# Altium PCB AC-Power-Monitor.PcbDoc (part 1 of 3)
Units mm, origin at the board's own origin, x right, y up, seen from the top; angles counter-clockwise.
Board outline 94 x 57 mm, 4 copper layers (Top Layer, N / GND, L / VCC, Bottom Layer), stack 0.673 mm thick; 70 components, 59 nets, 252 pads, 596 vias.
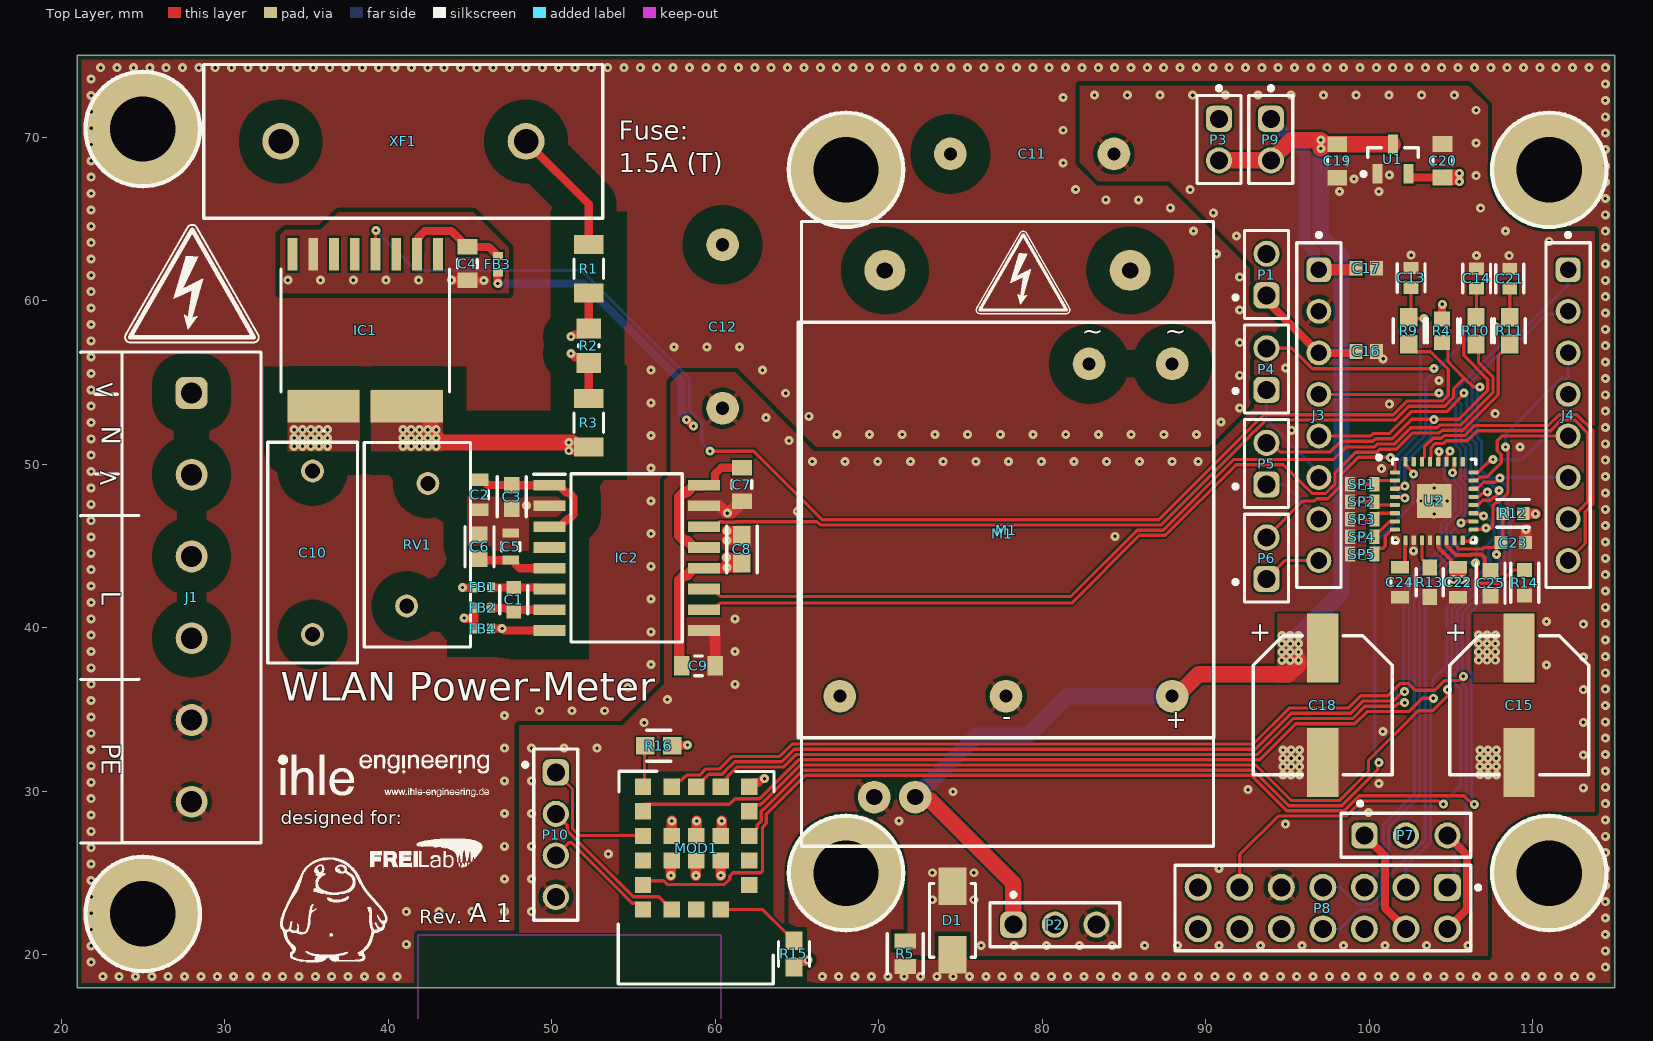
[diagram p0: Top Layer view]
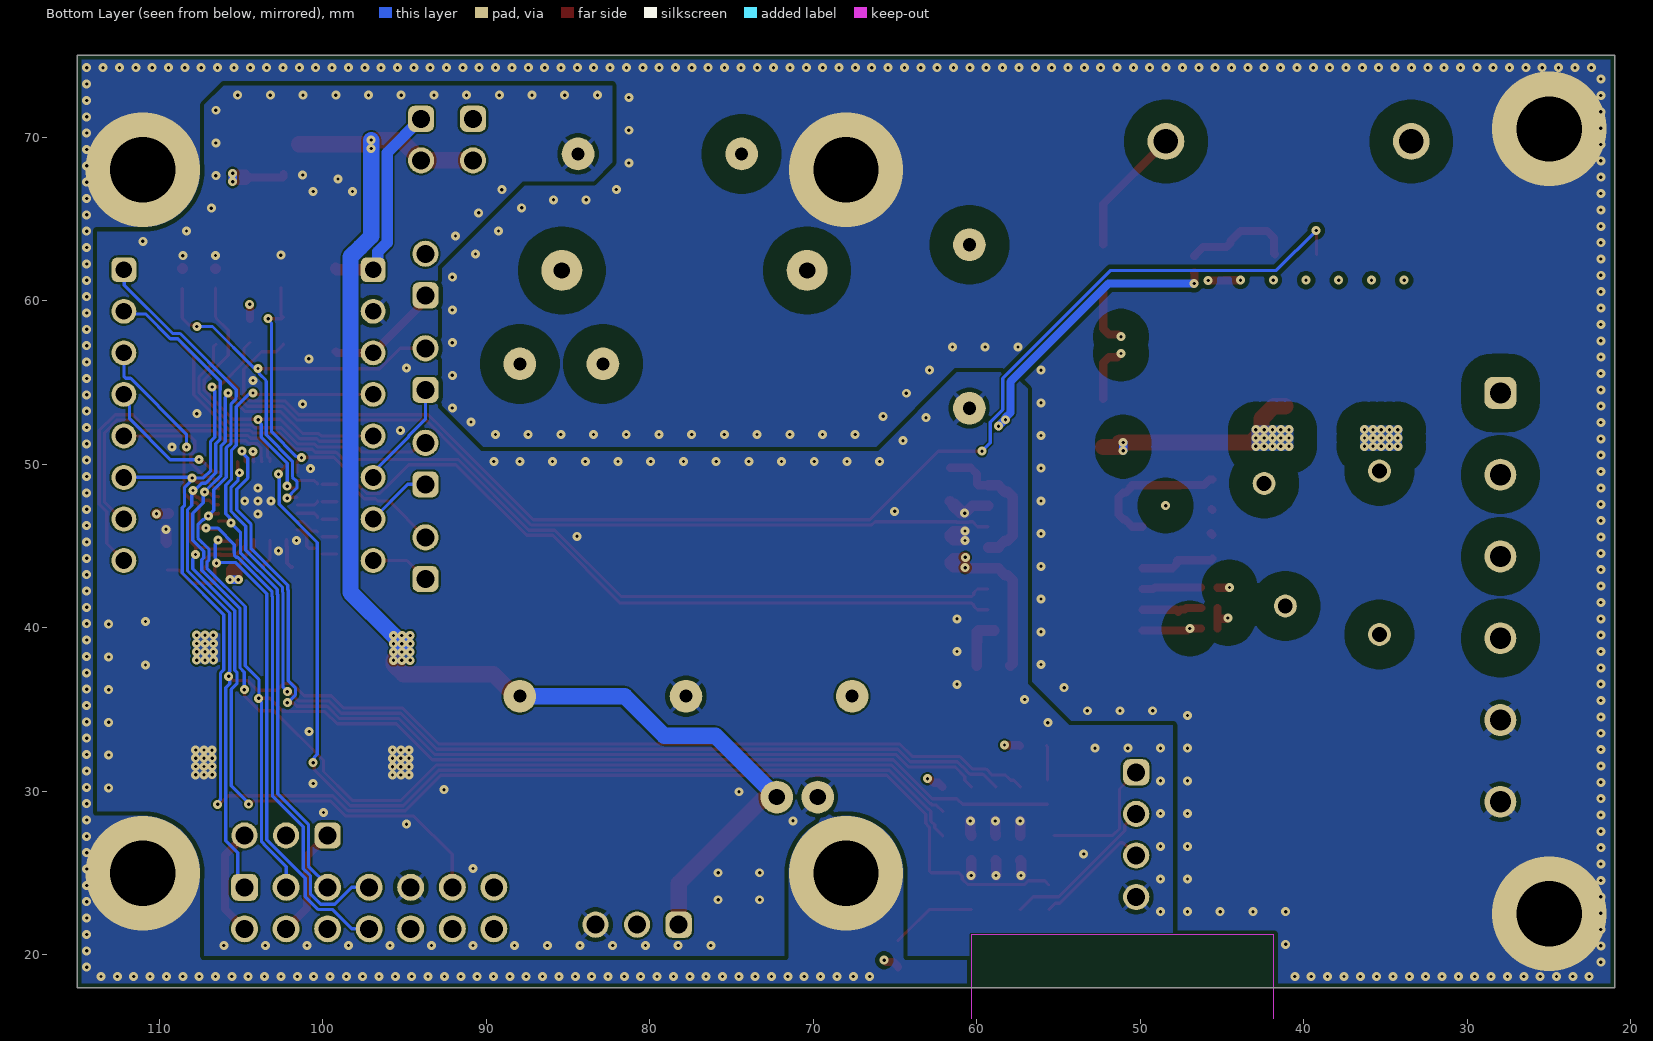
[diagram p1: Bottom Layer view, seen from below]
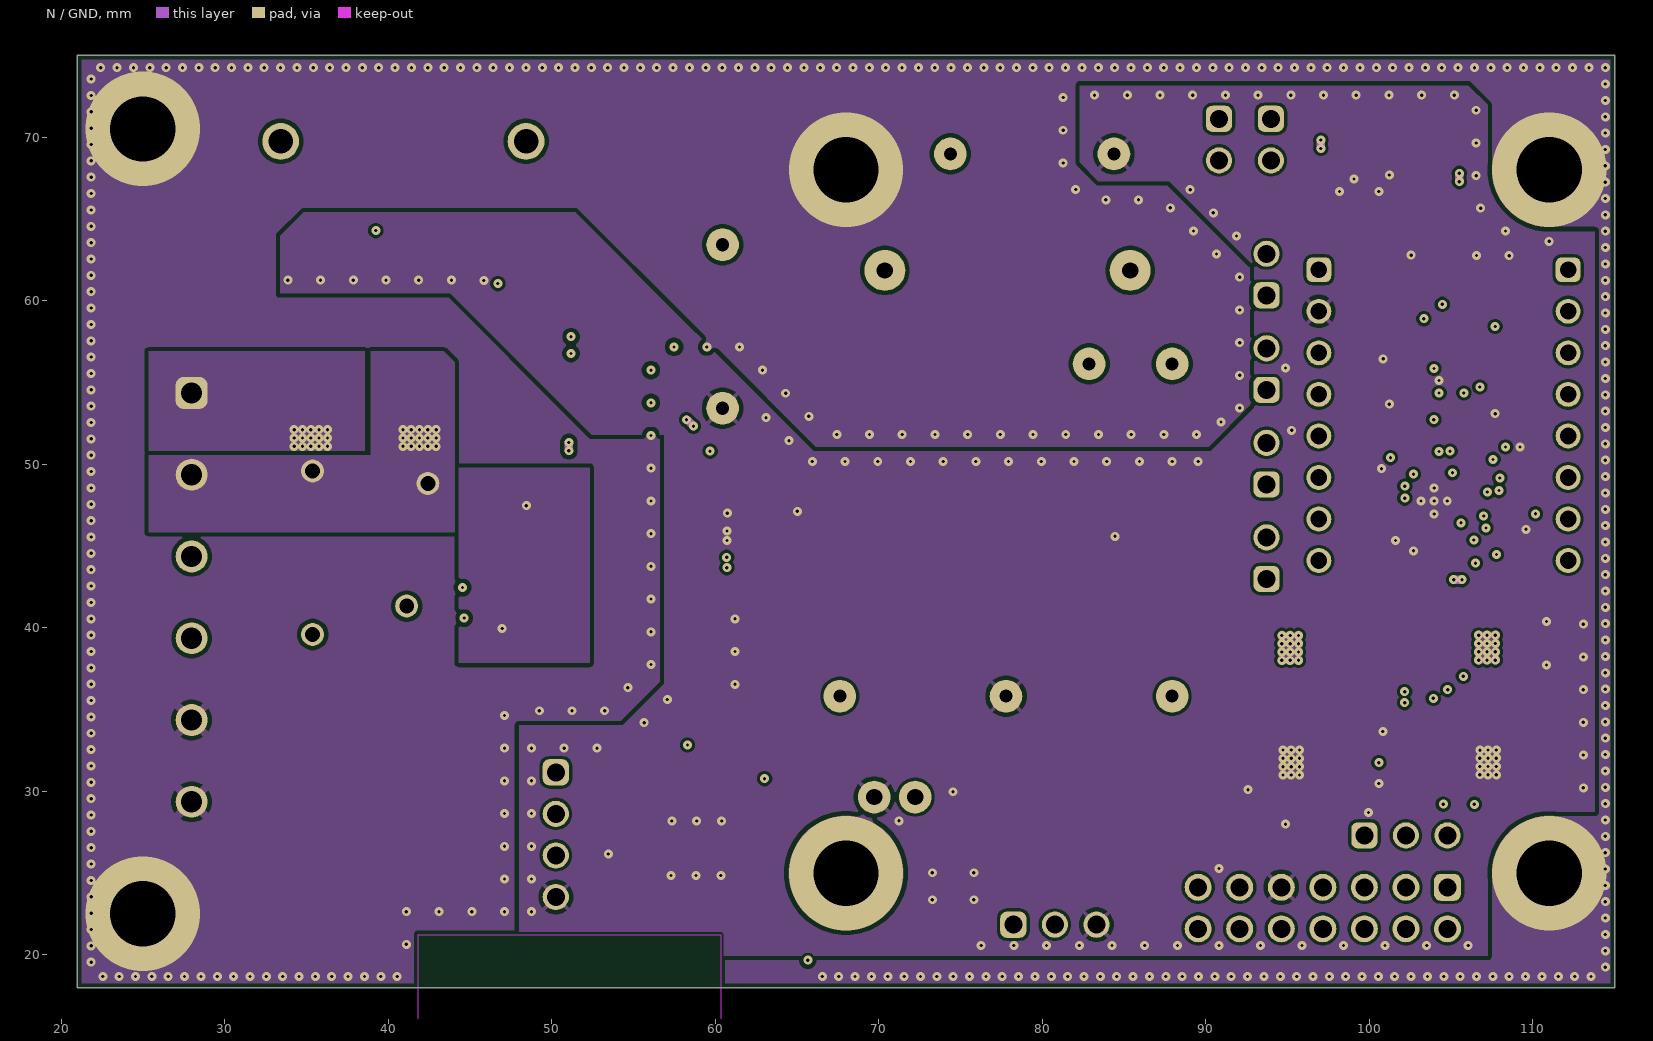
[diagram p2: N / GND]
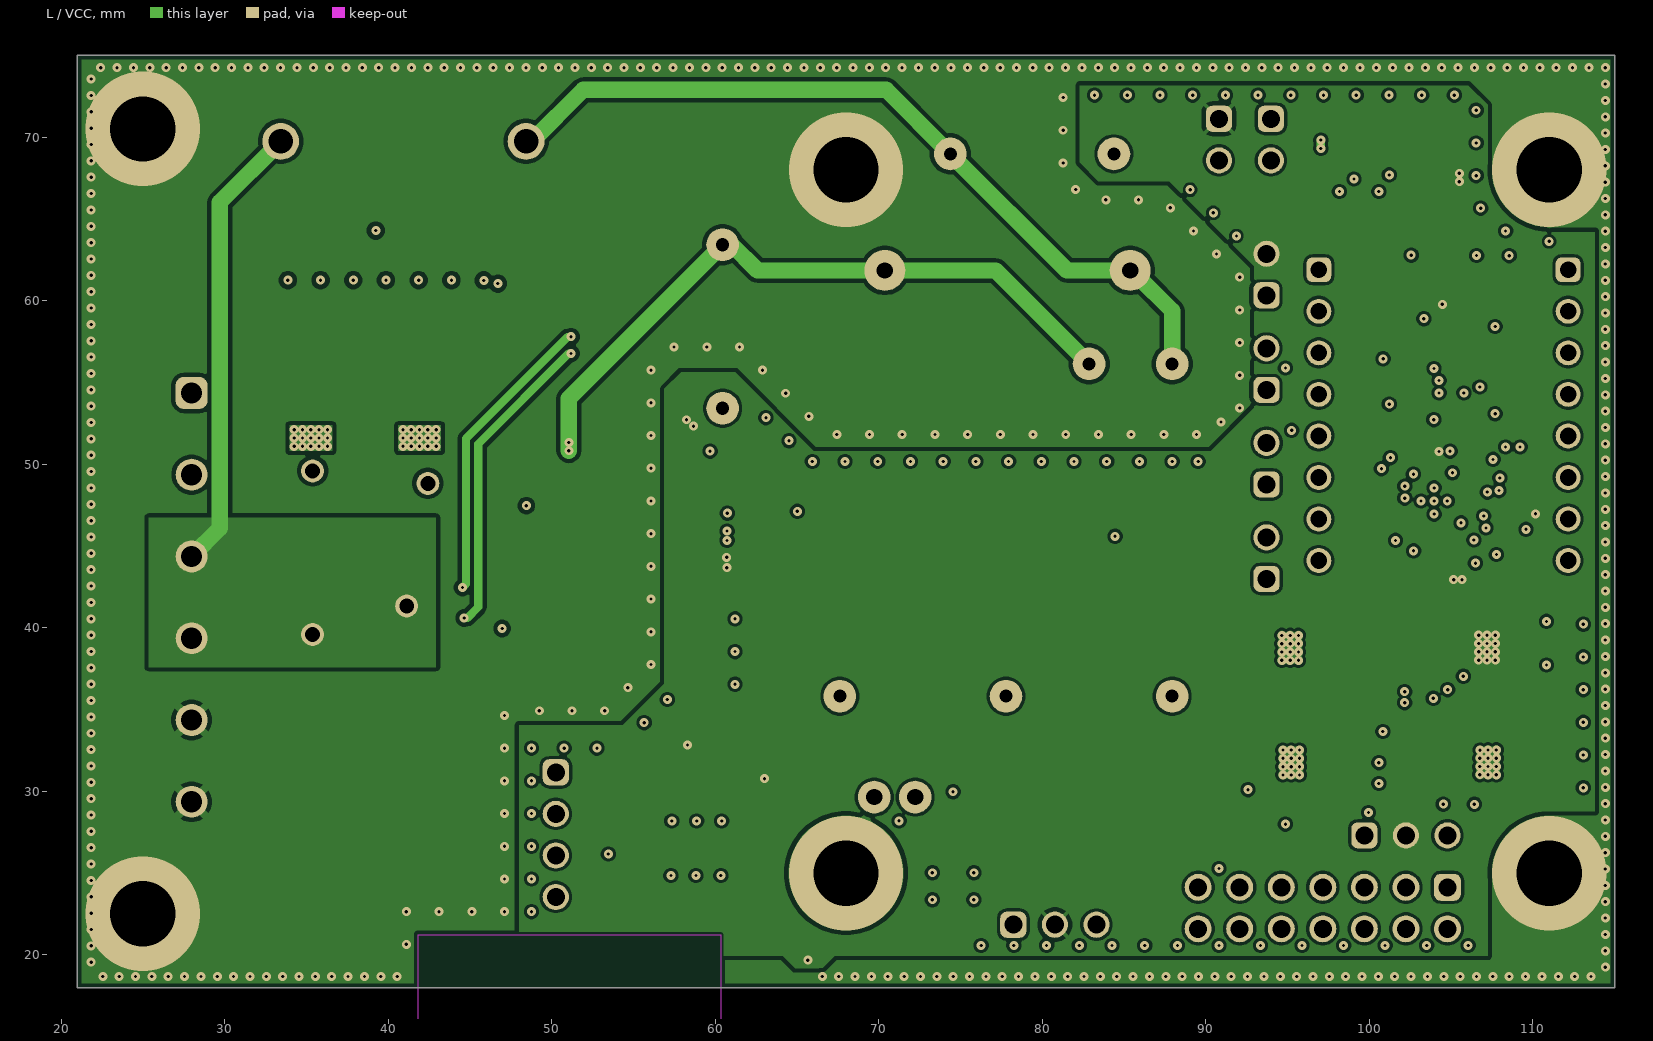
[diagram p3: L / VCC]
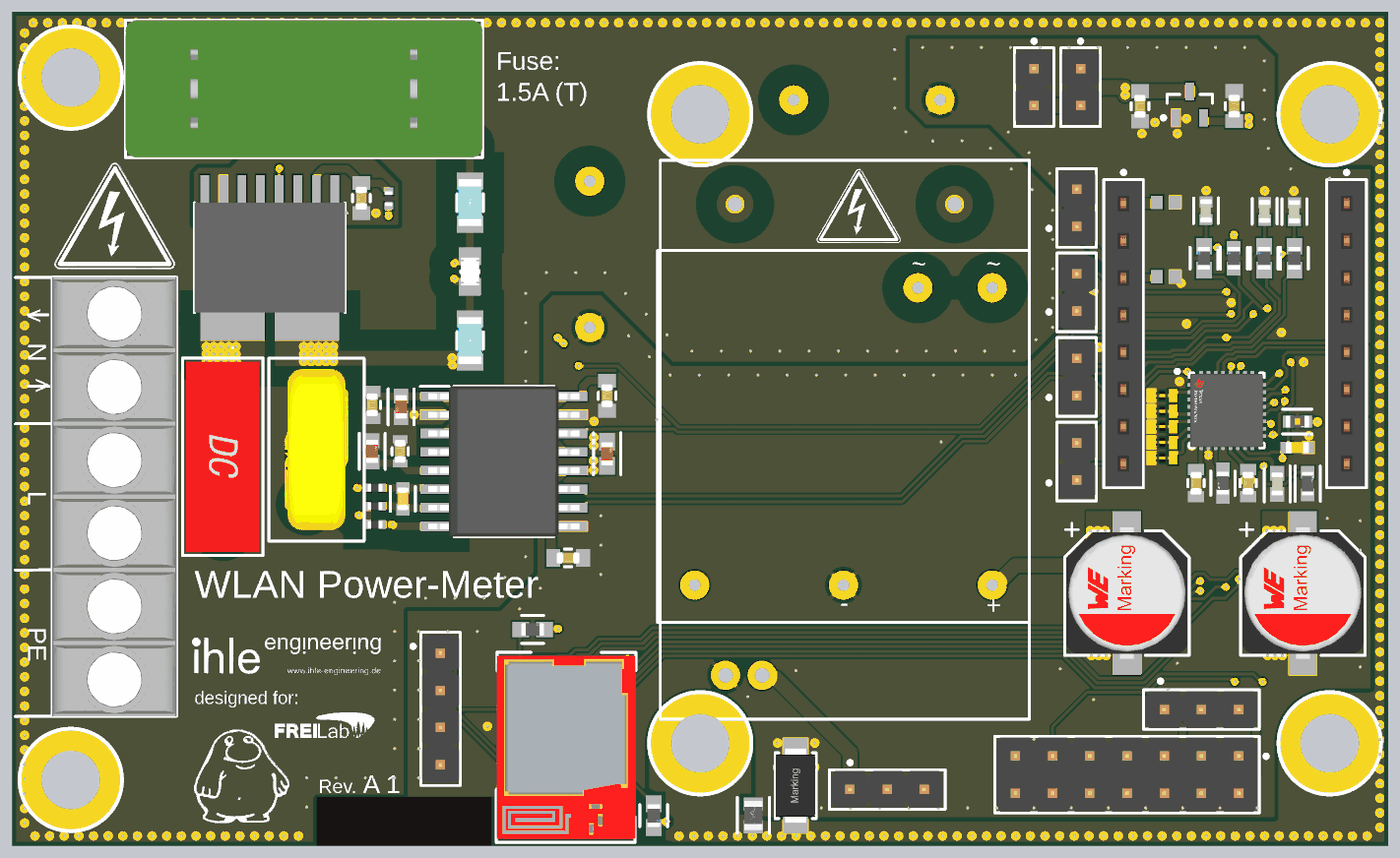
[diagram p5: 3D render of the assembled board from above, using the file's embedded part models]

## Layer stack, top to bottom
Top Solder: solder mask 0.0102, Solder Resist, Dk 3.5
Top Layer: signal copper 0.0356
Dielectric 2: prepreg 0.0711, PP-006, Dk 4.1
N / GND: signal copper 0.07
Dielectric 1: dielectric 0.32, FR-4, Dk 4.8
L / VCC: signal copper 0.07
Dielectric 3: prepreg 0.0711, PP-006, Dk 4.1
Bottom Layer: signal copper 0.0356
Bottom Solder: solder mask 0.0102, Solder Resist, Dk 3.5

## Board outline
21,18 115,18 115,75 21,75

## Design rules (kind name [scope] priority, off if disabled: settings)
AcuteAngle [All] p1: minimum=6.00000000000000E+0001 checktracksonly=FALSE
BoardOutlineClearance [All] p1: gap=0.254 ignorepadtopadclearanceinfootprint=FALSE except(0: Arc-SplitContinuation Track-SplitContinuation SMDPad-SplitContinuation THPad-SplitContinuation Via-SplitContinuation Fill-SplitContinuation Poly-SplitContinuation Region-SplitContinuation Text-SplitContinuation; 0.1: Track-OutlineEdge Text-OutlineEdge; 0.5: SMDPad-OutlineEdge THPad-OutlineEdge)
Clearance Clearance_230V_PE_others [InNet('PE') vs NOT InNetClass('230V AC Net')] p1: gap=0.2 ignorepadtopadclearanceinfootprint=FALSE
Clearance Clearance_230V_others [InNetClass('230V AC Net') vs NOT InNetClass('230V AC Net') AND OnOutside] p2: gap=1 ignorepadtopadclearanceinfootprint=FALSE
Clearance Clearance_half_230V_others [InNetClass('half 230V AC') vs NOT InNetClass('230V AC Net') AND OnOutside] p3: gap=1 ignorepadtopadclearanceinfootprint=FALSE
Clearance Clearance_230V_HighSide [InNetClass('HighSide') vs InNetClass('HighSide')] p4: gap=0.25 ignorepadtopadclearanceinfootprint=FALSE
Clearance Clearance_230V_N_Nout [InNet('N') vs InNet('Nout')] p5: gap=0.25 ignorepadtopadclearanceinfootprint=FALSE
Clearance Clearance_230V [InNetClass('230V AC Net')] p6: gap=0.25 ignorepadtopadclearanceinfootprint=FALSE
Clearance Clearance_half_230V [InNetClass('half 230V AC')] p7: gap=0.25 ignorepadtopadclearanceinfootprint=FALSE
Clearance Clearance_inner [OnMid] p8: gap=0.18 ignorepadtopadclearanceinfootprint=FALSE
Clearance [All] p9: gap=0.12 ignorepadtopadclearanceinfootprint=FALSE
ComponentClearance [All] p1: gap=0 collisioncheckmode=3 verticalgap=0.254 showdistances=FALSE
Creepage Creepage_Current_Sense [InNetClass('Current_Sense') vs InNetClass('Current_Sense')] p1: checkdistance=0.25 applytopolygonpour=TRUE
Creepage Creepage_230V_HighSide [InNetClass('HighSide') vs InNetClass('HighSide')] p2: checkdistance=0.25 applytopolygonpour=TRUE
Creepage Creepage_230V_PE_others [InNet('PE') vs NOT InNetClass('230V AC Net')] p3: checkdistance=0.25 applytopolygonpour=TRUE
Creepage Creepage_half_230V [InNetClass('half 230V AC') vs NOT InNetClass('HighSide')] p4: checkdistance=1.25
Creepage Creepage_230V_others [NOT InNetClass('230V AC Net') vs InNetClass('230V AC Net')] p5: checkdistance=4
Creepage Creepage_230V [InNetClass('230V AC Net') vs OnOutside] p6: checkdistance=1.4 applytopolygonpour=TRUE
Height [All] p1: minheight=0 maxheight=100 prefheight=12.7
HoleSize [All] p1: absolutevalues=TRUE maxlimit=4 minlimit=0.2 maxpercent=80.000 minpercent=20.000
PlaneConnect [All] p1: planeconnectstyle=Direct reliefexpansion=0.508 reliefentries=4 reliefconductorwidth=0.254 reliefairgap=0.254
PolygonConnect [All] p1: connectstyle=Direct reliefconductorwidth=0.254 reliefentries=4 polygonreliefangle="45 Angle" airgapwidth=0.254
RoutingVias [All] p1: holewidth=0.2 width=0.55 viastyle="Through Hole" minholewidth=0.2 minwidth=0.55 maxholewidth=4 maxwidth=7.1
SMDEntry [All] p1: side=TRUE corner=TRUE anyangle=TRUE
SilkToSilkClearance [All] p1 off: silktosilkclearance=0.254
SilkToSolderMaskClearance [IsPad] p1 off: minsilkscreentomaskgap=0.254 clearancetoexposedcopper=TRUE
SolderMaskExpansion [All] p1: expansion=0.05 istentingtop=FALSE
SupplyNets "Schematic Supply Nets_7" [InNet('Nout')] p1: voltage=0.000
SupplyNets "Schematic Supply Nets_6" [InNet('L')] p2: voltage=0.000
SupplyNets "Schematic Supply Nets_5" [InNet('GND')] p3: voltage=0.000
SupplyNets "Schematic Supply Nets_4" [InNet('N')] p4: voltage=0.000
SupplyNets "Schematic Supply Nets_3" [InNet('+5.0V')] p5: voltage=0.000
SupplyNets "Schematic Supply Nets_2" [InNet('Lfused')] p6: voltage=0.000
SupplyNets "Schematic Supply Nets_1" [InNet('PE')] p7: voltage=0.000
SupplyNets "Schematic Supply Nets" [InNet('+3.3V')] p8: voltage=0.000
Width [All] p1: maxlimit=1 minlimit=0.12 preferedwidth=0.4 midlayer1_minwidth=0.275 midlayer2_minwidth=0.275 minimp=50.000000 maximp=50.000000 favimp=50.000000
24 further rules are at their usual default settings.

## Classes and differential pairs
net class Current_Sense: N Nout
net class "half 230V AC": VN VP
net class HighSide: HGND NC1 NetC1_1 NetC1_2 NetC2_2 NetC5_2 NetIC2_4 VN VP
net class "230V AC Net": HGND L Lfused N NC1 NetC1_1 NetC1_2 NetC2_2 NetC5_2 NetIC2_4 Nout PE VN VP

## Components (designator, comment, footprint, x,y, rotation, side; value= is the part's Value field where it differs from the comment)
C1 "CC0603KRX7R9BB103" FP-CC0603-DA-MFG 47.685,41.71 r270 top value="10 nF"
C2 "CGA3E1X7R1E105K080AC" FP-CGA3E-0_3-0_1-IPC_B 45.593,48.133 r90 top
C3 "06035C102KAT2A" FP-0603-L_1_6_0_15-W_0_81-IPC_B 47.561,47.997 r270 top
C4 "CGA3E2X7R1H104K080AA" FP-CGA3E-0_3-0_1-IPC_A 44.851,62.263 r90 top
C5 "CGA3E2X7R1H104K080AA" FP-CGA3E-0_3-0_1-IPC_C 47.498,44.958 r270 top
C6 "06035C102KAT2A" FP-0603-L_1_6_0_15-W_0_81-IPC_B 45.593,44.958 r90 top
C7 "CGA3E2X7R1H104K080AA" FP-CGA3E-0_3-0_1-IPC_A 61.638,48.757 r90 top
C8 "06035C102KAT2A" FP-0603-L_1_6_0_15-W_0_81-IPC_A 61.638,44.794 r90 top
C9 "CGA3E1X7R1E105K080AC" FP-CGA3E-0_3-0_1-IPC_A 58.978,37.671 r180 top
C10 "10nF" WCAP-FTX2_L13W5H11_CS 35.384,44.588 r270 top
C11 "MKY22W21003I00" MKY22W2 79.383,68.973 r90 top
C12 "MKY22W21003I00" MKY22W2 60.452,58.42 r0 top
C13 "C0603C332J5GACTU" FP-C0603C-CF-MFG 102.552,61.397 r90 top value="3,300 pF"
C14 "C0603C332J5GACTU" FP-C0603C-CF-MFG 106.555,61.359 r90 top value="3,300 pF"
C15 "180µF" WCAP-PSLC_D8H11.7 109.165,35.264 r90 top
C16 "C0603C105K3RACTU" CAPC1608X87X35LL15T15 99.822,56.896 r180 top
C17 "C0603C105K3RACTU" CAPC1608X87X35LL15T15 99.822,61.976 r180 top
C18 "180µF" WCAP-PSLC_D8H11.7 97.15,35.264 r90 top
C19 "CGA3E1X7R1E105K080AC" FP-CGA3E-0_3-0_1-IPC_A 98.041,68.545 r90 top
C20 "CGA3E1X7R1E105K080AC" FP-CGA3E-0_3-0_1-IPC_A 104.48,68.553 r270 top
C21 "C0603C332J5GACTU" FP-C0603C-CF-MFG 108.585,61.341 r90 top value="3,300 pF"
C22 "CGA3E1X7R1E105K080AC" FP-CGA3E-0_3-0_1-IPC_B 105.429,42.782 r90 top
C23 "885012206085" WCAP-CSGP_0603_L1.6W0.8H0.8_Reflow 108.791,45.212 r180 top
C24 "CGA3E2X7R1H104K080AA" FP-CGA3E-0_3-0_1-IPC_B 101.873,42.782 r90 top
C25 "C0603C474K4RACTU" FP-C0603C-CF-IPC_B 107.414,42.727 r270 top value="0.47 μF"
D1 "400W, 54VDC" WE-TVSP_DO-214AC_Bidirectional 74.512,22.105 r90 top
FB1 "1800Ohm" WE-TMSB_0402_HF/HS/WB 45.785,42.462 r0 top
FB2 "1800Ohm" WE-TMSB_0402_HF/HS/WB 45.78,41.208 r0 top
FB3 "1800Ohm" WE-TMSB_0402_HF/HS/WB 46.72,62.23 r270 top
FB4 "1800Ohm" WE-TMSB_0402_HF/HS/WB 45.783,39.954 r0 top
IC1 "TMCS1127C1AQDVGR" TMCS1127C1AQDVGR 38.598,58.188 r90 top
IC2 "AMC3330DWER" SOIC127P1030X265-16N 54.585,44.274 r0 top
J1 "691131710006" 691131710006 27.984,41.859 r270 top
J3 "61300811821" 61300811821 96.915,52.999 r270 top
J4 "61300811821" 61300811821 112.155,52.999 r270 top
M1 "AC/DC-Buck-Module" AM11-12W05V 77.877,45.747 r270 top
M1 "AC/DC-Buck-Module" "TMPS 03" 77.784,45.974 r0 top
MOD1 "WIRL-COMB_2617011025000_1" WE-FP-7 58.84,24.97 r90 top
P1 "61300211121" 61300211121 93.718,61.598 r90 top
P2 "61300311121" 61300311121 80.772,21.844 r0 top
P3 "61300211121" 61300211121 90.805,69.85 r270 top
P4 "61300211121" 61300211121 93.718,55.818 r90 top
P5 "61300211121" 61300211121 93.718,50.038 r90 top
P6 "61300211121" 61300211121 93.718,44.258 r90 top
P7 "61300311121" 61300311121 102.235,27.305 r0 top
P8 "61301421121" 61301421121 97.155,22.86 r180 top
P9 "61300211121" 61300211121 93.98,69.85 r270 top
P10 "61300411121" 61300411121 50.256,27.35 r270 top
R1 "RK73H2BTTD1804F" FP-RK73H2B-IPC_B 52.274,61.954 r90 top
R2 "CRCW080510K0FKEA" FP-CRCW0805-e3-IPC_A 52.274,57.242 r90 top
R3 "RK73H2BTTD1804F" FP-RK73H2B-IPC_B 52.274,52.531 r90 top
R4 "CRCW060347K0FKEA" FP-CRCW0603-e3-IPC_B 104.442,58.158 r90 top
R5 "CRGCQ0805F1M0" FP-CRGCQ0805-IPC_C 71.628,20.066 r90 top value=1MΩ
R9 "CRCW0603470KFKEA" FP-CRCW0603-e3-IPC_A 102.411,58.158 r90 top
R10 "CRCW0603470KFKEA" FP-CRCW0603-e3-IPC_A 106.523,58.158 r90 top
R11 "CRCW0603470KFKEA" FP-CRCW0603-e3-IPC_A 108.585,58.158 r90 top
R12 "KTR03EZPF4702" FP-KTR03-IPC_C 108.791,46.99 r0 top
R13 "CPF0603B20KE1" FP-CPF0603-MFG 103.701,42.782 r90 top value=20KΩ
R14 "AC0603FR-071KL" FP-AC0603-IPC_B 109.498,42.75 r90 top
R15 "CRCW06031K50FKEA" FP-CRCW0603-e3-IPC_A 64.819,20.053 r270 top
R16 "CRCW06031K50FKEA" FP-CRCW0603-e3-IPC_A 56.553,32.781 r0 top
RV1 "275VAC, 350VDC" D12.5W6.5H16P1.3 41.784,45.076 r270 top
SP1 "Scratch_NetTie" Scratch_NetTie_0603 99.568,48.768 r0 top net-tie
SP2 "Scratch_NetTie" Scratch_NetTie_0603 99.568,47.702 r0 top net-tie
SP3 "Scratch_NetTie" Scratch_NetTie_0603 99.568,46.636 r0 top net-tie
SP4 "Scratch_NetTie" Scratch_NetTie_0603 99.568,45.57 r0 top net-tie
SP5 "Scratch_NetTie" Scratch_NetTie_0603 99.568,44.504 r0 top net-tie
U1 "MCP1700T-3302E/TT" SOT-23-TT3_L 101.448,68.655 r90 top
U2 "MSP430I2041TRHBR" FP-RHB0032M-MFG 103.965,47.752 r0 top
XF1 "696106003002" 696106003002 40.934,69.738 r0 top

## Footprints (in the part's own frame and the unit in brackets; to place one, negate y for a bottom-side part, rotate by r counter-clockwise, add the part's x,y. Pads: shape width x height; smd on the part's side, far side on the other; paste and mask are expansions set on the pad)
61300211121 [mm] "Pin Header, pitch 2.54 mm, THT, Vertical, single row, 2p"
  rrect50% 1.6x1.6 hole 1.1: 1(-1.27,0)
  round 1.6 hole 1.1: 2(1.27,0)
  silkscreen extent -2.69,-1.35 2.69,2.02, body extent -2.54,-1.27 2.54,1.27, height 8.57
61300311121 [mm] "Pin Header, pitch 2.54 mm, THT, Vertical, single row, 3p"
  rrect50% 1.6x1.6 hole 1.1: 1(-2.54,0)
  round 1.6 hole 1.1: 2(0,0) 3(2.54,0)
  silkscreen extent -3.96,-1.35 3.96,1.96, body extent -3.81,-1.27 3.81,1.27, height 8.57
61300411121 [mm] "Pin Header, pitch 2.54 mm, THT, Vertical, single row, 4p"
  rrect50% 1.6x1.6 hole 1.1: 1(-3.81,0)
  round 1.6 hole 1.1: 2(-1.27,0) 3(1.27,0) 4(3.81,0)
  silkscreen extent -5.23,-1.99 5.23,1.35, body extent -5.08,-1.27 5.08,1.27, height 8.57
61300811821 [mm] "Socket Header, Pitch 2.54 mm, THT, Vertical, single row, 8p"
  rrect50% 1.52x1.52 hole 1.02: 1(-8.89,0)
  round 1.52 hole 1.02: 2(-6.35,0) 3(-3.81,0) 4(-1.27,0) 5(1.27,0) 6(3.81,0) 7(6.35,0) 8(8.89,0)
  silkscreen extent -11.14,-1.35 10.54,1.35, body extent -10.41,-1.25 10.41,1.25, height 8.55
61301421121 [mm] "Pin Header, pitch 2.54 mm, THT, Vertical, dual row, 14p"
  rrect50% 1.65x1.65 hole 1.1: 1(-7.62,-1.27)
  round 1.65 hole 1.1: 2(-7.62,1.27) 3(-5.08,-1.27) 4(-5.08,1.27) 5(-2.54,-1.27) 6(-2.54,1.27) 7(0,-1.27) 8(0,1.27) 9(2.54,-1.27) 10(2.54,1.27) 11(5.08,-1.27) 12(5.08,1.27) 13(7.62,-1.27) 14(7.62,1.27)
  silkscreen extent -9.62,-2.62 9.04,2.62, body extent -8.89,-2.54 8.89,2.54, height 8.59
691131710006 [mm] "SERIE 1317 - 5.00 MM - HORIZONTAL CABLE ENTRY WITH PRESSURE CLAMP - WR-TBL"
  rrect50% 1.95x1.95 hole 1.3: 1(-12.5,0)
  round 1.95 hole 1.3: 2(-7.5,0) 3(-2.5,0) 4(2.5,0) 5(7.5,0) 6(12.5,0)
  silkscreen extent -15,-4.25 15,4.25, body extent -15,-4.25 15,4.25, height 15.5
696106003002 [mm] "FUSEHOLDER BLOCKS - PCB - CLIP COVER - THT"
  round 2.25 hole 1.5: 1(-7.5,0) 2(7.5,0)
  silkscreen extent -12.2,-4.7 12.2,4.7, body extent -12.2,-4.7 12.2,4.7, height 11.55
AM11-12W05V [mm]
  round 2.5 hole 1 mask-0.6: 1(-16.1,7.5) 2(-16.1,-7.5)
  round 2 hole 1: 3(16.1,-5.65) 4(16.1,-8.15)
  silkscreen extent -19.1,-12.6 19.1,12.6, body extent -19.1,-12.6 19.1,12.6, height 23
CAPC1608X87X35LL15T15 [mm] "Chip Capacitor, 2-Leads, Body 1.60x0.80mm, IPC High Density"
  rect 0.8x0.9 smd: 1(-0.625,0) 2(0.625,0)
  body extent -0.87,-0.48 0.87,0.48, height 0.87
D12.5W6.5H16P1.3 [mm] "Disk Varistor, Diameter 12.5mm, Width 6.5mm"
  round 1.4 hole 0.9: 1(-3.75,0.65) 2(3.75,-0.65)
  silkscreen extent -6.25,-3.25 6.25,3.25, body extent -5.5,-2.2 5.5,2.2, height 13.4
FP-0603-L_1_6_0_15-W_0_81-IPC_A [mil]
  rect 47.5x42.06 smd paste+0 mask+0: 1(-32.51,0) 2(32.51,0)
  silkscreen extent -56,-37 56,37, body extent -76,-41 76,41, height 10
FP-0603-L_1_6_0_15-W_0_81-IPC_B [mm]
  rect 1.007x0.968 smd paste+0 mask+0: 1(-0.726,0) 2(0.726,0)
  silkscreen extent -1.23,-0.88 1.23,0.88, body extent -1.48,-0.73 1.48,0.73, height 0.25
FP-AC0603-IPC_B [mm]
  rect 0.859x0.912 smd paste+0 mask+0: 1(-0.777,0) 2(0.777,0)
  silkscreen extent -1.21,-0.86 1.21,0.86, body extent -1.46,-0.71 1.46,0.71, height 0.25
FP-C0603C-CF-IPC_B [mm]
  rect 1.007x0.958 smd paste+0 mask+0: 1(-0.726,0) 2(0.726,0)
  silkscreen extent -1.23,-0.88 1.23,0.88, body extent -1.48,-0.73 1.48,0.73, height 0.25
FP-C0603C-CF-MFG [mm]
  rect 0.75x0.9 smd paste+0 mask+0: 1(-0.6,0) 2(0.6,0)
  silkscreen extent -0.87,-0.85 0.88,0.85, body extent -1.2,-0.6 1.2,0.6, height 0.25
FP-CC0603-DA-MFG [mm]
  rect 0.8x0.9 smd paste+0 mask+0: 1(-0.75,0) 2(0.75,0)
  silkscreen extent -0.85,-0.85 0.85,0.85, body extent -1.35,-0.75 1.35,0.75, height 0.25
FP-CGA3E-0_3-0_1-IPC_A [mm]
  rect 0.956x1.206 smd paste+0 mask+0: 1(-1.025,0) 2(1.025,0)
  silkscreen extent -0.25,-0.6 0.25,0.6, body extent -2,-1.1 2,1.1, height 0.25
FP-CGA3E-0_3-0_1-IPC_B [mm]
  rect 0.756x1.106 smd paste+0 mask+0: 1(-0.925,0) 2(0.925,0)
  silkscreen extent -0.25,-0.55 0.25,0.55, body extent -1.55,-0.8 1.55,0.8, height 0.25
FP-CGA3E-0_3-0_1-IPC_C [mm]
  rect 0.556x1.006 smd paste+0 mask+0: 1(-0.825,0) 2(0.825,0)
  silkscreen extent -0.25,-0.55 0.25,0.55, body extent -1.2,-0.65 1.2,0.65, height 0.25
FP-CPF0603-MFG [mm]
  rect 1x0.9 smd paste+0 mask+0: 1(-0.9,0) 2(0.9,0)
  silkscreen extent -0.82,-0.82 0.82,0.82, body extent -1.5,-0.55 1.5,0.55, height 0.25
FP-CRCW0603-e3-IPC_A [mm]
  rect 1.135x1.062 smd paste+0 mask+0: 1(-0.815,0) 2(0.815,0)
  silkscreen extent -0.75,-0.95 0.75,0.95, body extent -1.88,-1.03 1.88,1.03, height 0.25
FP-CRCW0603-e3-IPC_B [mm]
  rect 0.935x0.962 smd paste+0 mask+0: 1(-0.715,0) 2(0.715,0)
  silkscreen extent -0.75,-0.95 0.75,0.9, body extent -1.43,-0.73 1.43,0.73, height 0.25
FP-CRCW0805-e3-IPC_A [mil]
  rect 47.5x59.38 smd paste+0 mask+0: 1(-41.37,0) 2(41.37,0)
  silkscreen extent -3,-25 3,25, body extent -85,-49 85,49, height 10
FP-CRGCQ0805-IPC_C [mm]
  rect 0.906x1.31 smd paste+0 mask+0: 1(-0.776,0) 2(0.776,0)
  silkscreen extent -1.23,-1.1 1.23,1.1, body extent -1.33,-0.8 1.33,0.8, height 0.25
FP-KTR03-IPC_C [mm]
  rect 0.758x0.812 smd paste+0 mask+0: 1(-0.627,0) 2(0.627,0)
  silkscreen extent -1.01,-0.85 1.01,0.85, body extent -1.11,-0.55 1.11,0.55, height 0.25
FP-RHB0032M-MFG [mm]
  rrect40% 0.6x0.25 smd paste+0 mask+0: 1(-2.4,1.75) 2(-2.4,1.25) 3(-2.4,0.75) 4(-2.4,0.25) 5(-2.4,-0.25) 6(-2.4,-0.75) 7(-2.4,-1.25) 8(-2.4,-1.75) 17(2.4,-1.75) 18(2.4,-1.25) 19(2.4,-0.75) 20(2.4,-0.25) 21(2.4,0.25) 22(2.4,0.75) 23(2.4,1.25) 24(2.4,1.75)
  rrect40% 0.25x0.6 smd paste+0 mask+0: 9(-1.75,-2.4) 10(-1.25,-2.4) 11(-0.75,-2.4) 12(-0.25,-2.4) 13(0.25,-2.4) 14(0.75,-2.4) 15(1.25,-2.4) 16(1.75,-2.4) 25(1.75,2.4) 26(1.25,2.4) 27(0.75,2.4) 28(0.25,2.4) 29(-0.25,2.4) 30(-0.75,2.4) 31(-1.25,2.4) 32(-1.75,2.4)
  rrect5% 2.1x2.1 smd paste-1000 mask+0: 33(0,0)
  silkscreen extent -3.51,-2.55 2.55,2.79, body extent -2.8,-2.8 2.8,2.8, height 0.25
FP-RK73H2B-IPC_B [mm]
  rect 1.155x1.806 smd paste+0 mask+0: 1(-1.475,0) 2(1.475,0)
  silkscreen extent -0.6,-0.9 0.6,0.9, body extent -2.3,-1.15 2.3,1.15, height 0.25
MKY22W2 [mm] "10nF Y2 Capacitor"
  round 2 hole 0.8: 1(0,5) 2(0,-5)
  body extent -4,-6.5 4,6.5, height 11
Scratch_NetTie_0603 [mm] "NetTie / 0R-Bridge / scratch wire to open; add 0R 0603 to re-close"
  rect 0.6x0.9 smd paste-2539.97: 1(-0.75,0) 2(0.75,0)
  Top Layer lines w0.2: -0.45,0 0.45,0
  Top Layer keep-out region: -0.2,0.1 0.2,0.1 0.2,0.3 -0.2,0.3
  Top Layer keep-out region: 0.2,-0.1 -0.2,-0.1 -0.2,-0.3 0.2,-0.3
SOIC127P1030X265-16N [mm]
  rect 1.95x0.65 smd: 1(-4.725,4.445) 2(-4.725,3.175) 3(-4.725,1.905) 4(-4.725,0.635) 5(-4.725,-0.635) 6(-4.725,-1.905) 7(-4.725,-3.175) 8(-4.725,-4.445) 9(4.725,-4.445) 10(4.725,-3.175) 11(4.725,-1.905) 12(4.725,-0.635) 13(4.725,0.635) 14(4.725,1.905) 15(4.725,3.175) 16(4.725,4.445)
  silkscreen extent -5.7,-5.15 3.4,5.15, body extent -5.17,-5.15 5.17,5.15, height 2.59
SOT-23-TT3_L [mm] "SOT23, 3-Leads, Body 2.9x1.3mm, Pitch 0.95mm, Lead Span 2.4mm, IPC High Density"
  rect 1.2x0.6 smd: 1(-0.9,0.95) 2(-0.9,-0.95) 3(0.9,0)
  silkscreen extent -1.02,-1.55 0.7,1.92, body extent -0.7,-1.52 0.7,1.53, height 1.12
TMCS1127C1AQDVGR [mm]
  rect 2x4.41 smd: 1(-4.65,2.54) 2(-4.65,-2.54)
  rect 2x0.6 smd: 3(4.65,-4.445) 4(4.65,-3.175) 5(4.65,-1.905) 6(4.65,-0.635) 7(4.65,0.635) 8(4.65,1.905) 9(4.65,3.175) 10(4.65,4.445)
  silkscreen extent -6.2,-5.15 3.75,5.15, body extent -3.75,-5.15 3.75,5.15, height 2.75
"TMPS 03" [mm] "TRACO POWER AC/DC Power Supply TMPS 03 Series, 3 Watt"
  round 2 hole 0.8: 1(10.16,10.16) 2(5.08,10.16) 3(10.16,-10.16) 4(0,-10.16) NC(-10.16,-10.16)
  silkscreen extent -12.7,-12.7 12.7,12.7, body extent -12.7,-12.7 12.7,12.7, height 16.3
WCAP-CSGP_0603_L1.6W0.8H0.8_Reflow [mm] "Ceramic Capacitors, body 1.6x0.8mm"
  rect 0.8x0.8 smd: 1(-0.75,0) 2(0.75,0)
  body extent -0.8,-0.4 0.8,0.4, height 0.8
WCAP-FTX2_L13W5H11_CS [mm] "Film Capacitors, 13x5x11mm"
  round 1.4 hole 0.9: 1(-5,0) 2(5,0)
  silkscreen extent -6.75,-2.75 6.75,2.75, body extent -6.5,-2.5 6.5,2.5, height 11.05
WCAP-PSLC_D8H11.7 [mm] "Aluminum Polymer Capacitor, Diameter 8mm"
  rect 4.2x1.9 smd: 1(3.5,0) 2(-3.5,0)
  silkscreen extent -4.25,-4.25 4.25,4.25, body extent -4.5,-4.15 4.5,4.15, height 11.7
WE-FP-7 [mm]
  rect 1x1 smd mask+0.05: 1(-0.7,-3.25) 2(0.8,-3.25) 3(2.3,-3.25) 4(3.8,-3.25) 5(5.3,-3.25) 6(5.3,-1.5) 7(5.3,0) 8(5.3,1.5) 9(5.3,3.25) 10(3.8,3.25) 11(2.3,3.25) 12(0.8,3.25) 13(-0.7,3.25) 14(-2.2,3.25) 15(-2.2,1.5) 16(-2.2,0) 17(-2.2,-1.5) B1(0.8,-1.5) B2(2.3,-1.5) B3(2.3,0) B4(2.3,1.5) B5(0.8,1.5) B6(0.8,0)
  Top Layer pour cut-out: 6.25,4.75 6.25,-4.73 -6.74,-4.73 -6.74,4.75
  Keep-Out Layer region: -20.48,17 -3.75,17 -3.75,5.3 -3.75,3.2 -3.75,-1.5 -20.48,-1.5
  silkscreen extent -6.75,-4.76 6.25,4.76, body extent -6.5,-4.75 6,4.75, height 2.05
WE-TMSB_0402_HF/HS/WB [mm] "SMT EMI Suppression Ferrite Bead, body 1.00x0.50mm"
  rect 0.5x0.6 smd: 1(-0.5,0) 2(0.5,0)
  body extent -0.5,-0.25 0.5,0.25, height 0.5
WE-TVSP_DO-214AC_Bidirectional [mm] "Power TVS Diode, 2-Leads. body 4.24x2.67mm"
  rect 2.3x1.7 smd: 1(-2.1,0) 2(2.1,0)
  silkscreen extent -2.25,-1.4 2.25,1.4, body extent -2.56,-1.33 2.56,1.34, height 2.24

## Part data
C1: library part CMP-2100-03600-2, "CAP CER 10000PF 50V X7R 0603", Capacitance="10 nF", Manufacturer=YAGEO, Package=CC0603-DA, Temperature="-55°C to +125°C", Temperature Characteristic=X7R, Temperature Coefficient=15%, Temperature Range High=+125°C, Temperature Range Low=-55°C, Tolerance=0.1, voltage="50 V", Automotive=No, Category=Cap, ComponentLink2Description=Datasheet, ComponentLink2URL=http://www.yageo.com/documents/recent/UPY-GPHC_X7R_6.3V-to-50V_18.pdf, Device Class L1="Passive Components", Device Class L2=Capacitors, Device Class L3="Ceramic Capacitors", Digikey Description="CAP CER 10000PF 50V X7R 0603", Footprint Url=http://www.yageo.com/exep/pages/download/literatures/UPY-C_GEN_24.pdf, Height=0.9mm, Lead Free=Yes, Manufacturer Part Number=CC0603KRX7R9BB103, Material=Ceramic, Mouser Description="Multilayer Ceramic Capacitor, CC Series, 0.01 - F, - 10%, X7R, 50 V, 0603 [1608 Metric]", Octopart=https://octopart.com/cc0603krx7r9bb103-yageo-192938, RoHS=TRUE, Voltage Rating="50 V"
C2 C9 C19 C20 C22: library part CMP-08246-001507-1, "Cap Ceramic 1uF 25V X7R 10% Pad SMD 0603 +125°C Automotive T/R", Capacitance=1uF, Case Code (Imperial)=0603, Case Code (Metric)=1608, Dielectric=X7R, Max Operating Temperature=125°C, Min Operating Temperature=-55°C, Package Quantity=4000, Ratings=AEC-Q200, Tolerance=10%, voltage=25V, Case/Package=0603, Composition=Ceramic, Depth=0.8mm, Height=0.8mm, Lead Free="Lead Free", Length=1.6mm, Mount="Surface Mount", Packaging="Tape and Reel", REACH SVHC="No SVHC", Termination=SMD/SMT, Thickness=0.035inch, Voltage Rating=25V, Voltage Rating (DC)=25V, Weight=7.1E-05oz, Width=0.031inch
C3 C6 C8: library part CMP-2006-04378-2, "General Purpose Ceramic Capacitor, 0603, 1nF, 10%, X7R, 15%, 50V", Capacitance=1nF, Case Code (Imperial)=0603, Case Code (Metric)=1608, Dielectric=X7R, Dielectric Material=Ceramic, Max Operating Temperature=125°C, Min Operating Temperature=-55°C, Package Quantity=4000, Tolerance=10%, voltage=50V, Case/Package=0603, Construction=Flat, Contact Plating=Tin, Depth=0.81mm, Height=0.9mm, Lead Free="Lead Free", Length=1.6mm, Mount="Surface Mount", Number of Pins=2, Packaging="Tape and Reel", Radiation Hardening=No, REACH SVHC="No SVHC", RoHS Compliant=Yes, Series=-, Termination=SMD/SMT, Thickness=0.035inch, Voltage Rating=50V, Voltage Rating (DC)=50V, Weight=7.1E-05oz, Width=0.032inch
C4 C5 C7 C24: library part CMP-2000-07546-2, "Cap Ceramic 100nF 50V X7R 10% Pad SMD 0603 +125°C Automotive T/R", Capacitance=100nF, Case Code (Imperial)=0603, Case Code (Metric)=1608, Dielectric=X7R, Max Operating Temperature=125°C, Min Operating Temperature=-55°C, Package Quantity=1, Ratings=AEC-Q200, Tolerance=10%, voltage=50V, Case/Package=0603, Composition=Ceramic, Depth=0.8mm, Height=0.8mm, Lead Free="Lead Free", Length=1.6mm, Mount="Surface Mount", Packaging="Tape and Reel", Radiation Hardening=No, REACH SVHC="No SVHC", Termination=SMD/SMT, Thickness=0.035inch, Voltage Rating=50V, Voltage Rating (DC)=50V, Weight=7.1E-05oz, Width=0.8mm
C10: library part 890324023006CS, "WCAP-FTX2 Film Capacitor, THT, L13 x W5 x H11mm, 10nF, 275V", Capacitance Tolerance=+/-10%, Insulation Resistance=30GOhm, Manufacturer="Wurth Elektronik", Operating Temperature Max=105°C, Operating Temperature Min=-40°C, Rate of Voltage Rise=500V/us, Rated Voltage (AC)=275V, Capacitance=10nF, Category="Film Capacitors", ComponentLink1Description="Website Link", ComponentLink1URL=https://www.we-online.com/redexpert/article/890324023006CS?ad, ComponentLink2Description="Datasheet Link", ComponentLink2URL=https://www.we-online.com/redexpert/spec/890324023006CS?ad, Dissipation Factor @1kHz=0.1%, Dissipation Factor @10kHz=0.1%, Dissipation Factor @100kHz=0.5%, Height=11mm, Length=13mm, Manufacturer Part Number=890324023006CS, Match Code=WCAP-FTX2, Mount="Through Hole", Packaging=Carton, Pitch=10mm, Safty Class=X2, Technical Reference=MX2P010103K275ACPP56004, Width=5mm
C11 C12: library part C_unipolar, Capacitance=10nF, Voltage (AC)=300V, Pitch=10mm, Safty Class=Y2
C13 C14 C21: library part CMP-2006-03334-2, "CAP CER 3300PF 50V 5% NP0 0603", Capacitance="3,300 pF", Manufacturer=KEMET, Package=C0603C-CF, Temperature="-55°C to +125°C", Temperature Characteristic=C0G, Temperature Coefficient=30ppm/°C, Temperature Range High=+125°C, Temperature Range Low=-55°C, Tolerance=0.05, Voltage Rating="50 V", Automotive=Yes, Automotive Grade="Grade 1", Category=Cap, ComponentLink2Description=Datasheet, ComponentLink2URL=https://api.kemet.com/component-edge/download/datasheet/C0603C100J5GACAUTO.pdf, Device Class L1="Passive Components", Device Class L2=Capacitors, Device Class L3="Ceramic Capacitors", Digikey Description="CAP CER 3300PF 50V 5% NP0 0603", Height=0.87mm, Lead Free=Yes, Manufacturer Part Number=C0603C332J5GACTU, Material=Ceramic, Mouser Description="Multilayer Ceramic Capacitors MLCC - SMD/SMT 50volts 3300pF 5% C0G", Octopart=https://octopart.com/c0603c332j5gactu-kemet-12580539, RoHS=TRUE
C15: library part 875075155001, "WCAP-PSLC Aluminum Polymer Capacitor, V-Chip SMT, D8 x H11.7mm, 180µF, 6.3V", Capacitance Tolerance=+/-20%, Leakage Current=226.8µA, Manufacturer="Wurth Elektronik", Operating Temperature Max=105°C, Operating Temperature Min=-55°C, Rated Voltage (DC)=6.3V, Ripple Current=5200mA, Capacitance=180µF, Category="Aluminum Polymer Capacitors", ComponentLink1Description="Website Link", ComponentLink1URL=https://www.we-online.com/redexpert/article/875075155001?ad, ComponentLink2Description="Datasheet Link", ComponentLink2URL=https://www.we-online.com/redexpert/spec/875075155001?ad, Diameter=8mm, Dissipation Factor=8%, Endurance=2000h, ESR=8mΩ, Height=11.7mm, Manufacturer Part Number=875075155001, Match Code=WCAP-PSLC, Mount="Surface Mount", Packaging="Tape and Reel", Technical Reference=PSEE117181M6R3DVCTFB000
C16 C17: library part CMP-2006-03713-1, Capacitance=1.0uF, Manufacturer=Kemet, Rated Voltage=25V, Part Number=C0603C105K3RACTU
C18: library part 875075355001, "WCAP-PSLC Aluminum Polymer Capacitor, V-Chip SMT, D8 x H11.7mm, 180µF, 16V", Capacitance Tolerance=+/-20%, Leakage Current=576µA, Manufacturer="Wurth Elektronik", Operating Temperature Max=105°C, Operating Temperature Min=-55°C, Rated Voltage (DC)=16V, Ripple Current=4700mA, Capacitance=180µF, Category="Aluminum Polymer Capacitors", ComponentLink1Description="Website Link", ComponentLink1URL=https://www.we-online.com/redexpert/article/875075355001?ad, ComponentLink2Description="Datasheet Link", ComponentLink2URL=https://www.we-online.com/redexpert/spec/875075355001?ad, Diameter=8mm, Dissipation Factor=8%, Endurance=2000h, ESR=10mΩ, Height=11.7mm, Manufacturer Part Number=875075355001, Match Code=WCAP-PSLC, Mount="Surface Mount", Packaging="Tape and Reel", Technical Reference=PSEE117181M016DVCTFB000
C23: library part CMP-03913-53914794-1, "885012206085 Multilayer Ceramic Capacitor, Wcap-Csgp Series, 2200 Pf, 10%, X7R, 50 V, 0603 [1608 Metric] Rohs Compliant: Yes...", Capacitance=2.2nF, Case Code (Imperial)=0603, Case Code (Metric)=1608, Dielectric=X7R, Insulation Resistance=10GΩ, Max Operating Temperature=125°C, Min Operating Temperature=-55°C, Tolerance=10%, Voltage Rating=50V, Case/Package=0603, Height=800µm, Length=1.6mm, Mount="Surface Mount", NexarPartId=53914794, Packaging="Cut Tape (CT)", REACH SVHC=Unknown, RoHS=Compliant, Thickness=939.8µm, Voltage Rating (DC)=50V, Width=800µm
C25: library part CMP-2006-03235-2, "CAP CER 0.47UF 16V X7R 0603", Capacitance="0.47 μF", Manufacturer=KEMET, Package=C0603C-CF, Temperature="-55°C to +125°C", Temperature Characteristic=X7R, Temperature Coefficient=30ppm/°C, Temperature Range High=+125°C, Temperature Range Low=-55°C, Tolerance=0.1, Voltage Rating="16 V", Automotive=Yes, Automotive Grade="Grade 1", Category=Cap, ComponentLink2Description=Datasheet, ComponentLink2URL=https://api.kemet.com/component-edge/download/datasheet/C0603C100J5GACAUTO.pdf, Device Class L1="Passive Components", Device Class L2=Capacitors, Device Class L3="Ceramic Capacitors", Digikey Description="CAP CER 0.47UF 16V X7R 0603", Height=0.87mm, Lead Free=Yes, Manufacturer Part Number=C0603C474K4RACTU, Material=Ceramic, Mouser Description="0603 C 470nF Ceramic Multilayer Capacitor, 16 V, +125degC, X7R Dielec, +/-10%", Octopart=https://octopart.com/c0603c474k4ractu-kemet-109683, RoHS=TRUE
D1: library part 824501541, "WE-TVSP SMT Power TVS Diode, DO-214AC, Bidirectional, 400W, 54VDC", (Reverse) Breakdown Voltage=63.15V, (Reverse) Peak Pulse Current=4.6A, Case/Size Code=DO-214AC, Clamping Voltage=87.1V, Manufacturer="Wurth Elektronik", Operating Temperature Max=150°C, Operating Temperature Min=-65°C, Operating Voltage (DC)=54V, Power Dissipation=400W, Category="Surge Protection", ComponentLink1Description="Website Link", ComponentLink1URL=https://www.we-online.com/redexpert/article/824501541?ad, ComponentLink2Description="Datasheet Link", ComponentLink2URL=https://www.we-online.com/redexpert/spec/824501541?ad, Height=2.25mm, Length=4.24mm, Manufacturer Part Number=824501541, Match Code=WE-TVSP, Mount="Surface Mount", Packaging="Tape and Reel", Polarity=Bidirectional, Width=2.67mm
FB1 FB2 FB3 FB4: library part 74269244182, "WE-TMSB Tiny Multilayer Suppression Bead, size 0402, 1800Ohm, 0.21A", Case/Size Code=0402, DC Resistance=1910mOhm, Manufacturer="Wurth Elektronik", Operating Temperature Max=125°C, Operating Temperature Min=-55°C, Rated Current=0.21A, Category="Ferrites for PCB Assembly", ComponentLink1Description="Website Link", ComponentLink1URL=https://www.we-online.com/redexpert/article/74269244182?ad, ComponentLink2Description="Datasheet Link", ComponentLink2URL=https://www.we-online.com/redexpert/spec/74269244182?ad, Height=0.5mm, Impedance @1GHz=1500Ohm, Impedance @100MHz=1800Ohm, Impedance Max=2700Ohm, Impedance Max Test Condition=450MHz, Length=1mm, Manufacturer Part Number=74269244182, Match Code=WE-TMSB, Mount="Surface Mount", Packaging="Tape and Reel", Type="High Frequency", Width=0.5mm
IC1: "Integrated Circuit", Manufacturer_Name="Texas Instruments", Arrow Part Number=TMCS1127C1AQDVGR, Arrow Price/Stock=https://www.arrow.com/en/products/tmcs1127c1aqdvgr/texas-instruments?region=nac, Datasheet Link=https://www.ti.com/lit/ds/symlink/tmcs1127.pdf?ts=1735303481537&ref_url=https%253A%252F%252Fwww.ti.com%252Fproduct%252FTMCS1127%252Fpart-details%252FTMCS1127C1AQDVGR, Height=2.65mm, Manufacturer_Part_Number=TMCS1127C1AQDVGR
IC2: "Integrated Circuit", Manufacturer_Name="Texas Instruments", Mouser Part Number=595-AMC3330DWER, Arrow Part Number=AMC3330DWER, Arrow Price/Stock=https://www.arrow.com/en/products/amc3330dwer/texas-instruments?utm_currency=USD&region=nac, Datasheet Link=https://www.ti.com/lit/ds/symlink/amc3330.pdf?ts=1627904955935&ref_url=https%253A%252F%252Fwww.ti.com%252Fproduct%252FAMC3330, Height=2.65mm, Manufacturer_Part_Number=AMC3330DWER, Mouser Price/Stock=https://www.mouser.co.uk/ProductDetail/Texas-Instruments/AMC3330DWER?qs=zW32dvEIR3u5qLqnY17MoA%3D%3D
J1: "WR-TBL Series 1317 Horizontal Entry, THT, pitch 5mm, 06p", Manufacturer="Wurth Elektronik", Max Operating Temperature=120°C, Min Operating Temperature=-30°C, Rated Current=16A, Working Voltage=300V, Application="Pressure Clamp Divisible", Category="Terminal Block", ComponentLink1Description="Website Link", ComponentLink1URL=https://www.we-online.com/redexpert/article/691131710006?ad, ComponentLink2Description="Datasheet Link", ComponentLink2URL=https://www.we-online.com/redexpert/spec/691131710006?ad, Manufacturer Part Number=691131710006, Match Code=WR-TBL, Modularity=No, Mount="Through Hole", Number of Pins=6, Number of Rows=1, Orientation=Horizontal, Packaging=Box, Pitch=5mm, System="Wire Protector"
J3 J4: "WR-PHD Socket Header, THT, Vertical, pitch 2.54mm, 1 Row, 8P", Contact Resistance=20mOhm, Manufacturer="Wurth Elektronik", Operating Temperature Max=125°C, Operating Temperature Min=-40°C, Rated Current=3A, Withstanding Voltage=500V, Working Voltage=250V, Category="Board-to-Board Connectors", ComponentLink1Description="Website Link", ComponentLink1URL=https://www.we-online.com/redexpert/article/61300811821?ad, ComponentLink2Description="Datasheet Link", ComponentLink2URL=https://www.we-online.com/redexpert/spec/61300811821?ad, Gender="Socket Header", Manufacturer Part Number=61300811821, Match Code=WR-PHD, Mount="Through Hole", Number of Pins=8, Number of Rows=1, Orientation=Vertical, Packaging=Tray, Pitch=2.54mm
M1: Output Voltage=5.0V
MOD1: "Stephano-I - Combined 2.4 GHz Wi-Fi and Bluetooth® LE 5.0 Module", Frequency=2402-2480MHz, Operating Supply Voltage max.="3.6 V", Operating Supply Voltage min.="3 V", Operating Temperature="-40 to +85degC", Output Power e.r.p.="4 dBm", Part Number=2617011025000, ComponentLink1Description=Manufacturer, ComponentLink1URL=http://www.we-online.de, ComponentLink2Description=Datasheet, ComponentLink2URL=https://katalog.we-online.de/wco/datasheet/2617011025000.pdf, Line of Sight Range=600, Mounting Technology=SMT, Packaging="Tape and Reel", Published Date="October 2023", Publisher="Wurth Elektronik", RF Bitrate max.="2 Mbps", RX sensitivity e.r.p.="-98 dBm"
P1 P3 P4 P5 P6 P9: "WR-PHD Pin Header, THT, Vertical, pitch 2.54mm, 1 Row, 2P", Contact Resistance=20mOhm, Manufacturer="Wurth Elektronik", Operating Temperature Max=105°C, Operating Temperature Min=-40°C, Rated Current=3A, Withstanding Voltage=500V, Working Voltage=250V, Category="Board-to-Board Connectors", ComponentLink1Description="Website Link", ComponentLink1URL=https://www.we-online.com/redexpert/article/61300211121?ad, ComponentLink2Description="Datasheet Link", ComponentLink2URL=https://www.we-online.com/redexpert/spec/61300211121?ad, Gender="Pin Header", Manufacturer Part Number=61300211121, Match Code=WR-PHD, Mount="Through Hole", Number of Pins=2, Number of Rows=1, Orientation=Vertical, Packaging=Bag, Pitch=2.54mm
  P1: Purpose="3.3V to ESP32"
  P3: Purpose="Bridge 5.0V to 3.3V"
  P4: Purpose="A1N to ESP32"
  P5: Purpose="A1P to ESP32"
  P6: Purpose="A0 to ESP32"
  P9: Purpose="5.0V to ESP32"
P2 P7: "WR-PHD Pin Header, THT, Vertical, pitch 2.54mm, 1 Row, 3P", Contact Resistance=20mOhm, Manufacturer="Wurth Elektronik", Operating Temperature Max=105°C, Operating Temperature Min=-40°C, Rated Current=3A, Withstanding Voltage=500V, Working Voltage=250V, Category="Board-to-Board Connectors", ComponentLink1Description="Website Link", ComponentLink1URL=https://www.we-online.com/redexpert/article/61300311121?ad, ComponentLink2Description="Datasheet Link", ComponentLink2URL=https://www.we-online.com/redexpert/spec/61300311121?ad, Gender="Pin Header", Manufacturer Part Number=61300311121, Match Code=WR-PHD, Mount="Through Hole", Number of Pins=3, Number of Rows=1, Orientation=Vertical, Packaging=Bag, Pitch=2.54mm
  P2: Purpose=Power-Outputs
  P7: Purpose="JTAG-Power Selector"
P8: "WR-PHD Pin Header, THT, Vertical, pitch 2.54mm, 2 Row, 14P", Contact Resistance=20mOhm, Manufacturer="Wurth Elektronik", Operating Temperature Max=105°C, Operating Temperature Min=-40°C, Rated Current=3A, Withstanding Voltage=500V, Working Voltage=250V, Category="Board-to-Board Connectors", ComponentLink1Description="Website Link", ComponentLink1URL=https://www.we-online.com/redexpert/article/61301421121?ad, ComponentLink2Description="Datasheet Link", ComponentLink2URL=https://www.we-online.com/redexpert/spec/61301421121?ad, Gender="Pin Header", Manufacturer Part Number=61301421121, Match Code=WR-PHD, Mount="Through Hole", Number of Pins=14, Number of Rows=2, Orientation=Vertical, Packaging=Bag, Pitch=2.54mm, Purpose=JTAG-Interface
P10: "WR-PHD Pin Header, THT, Vertical, pitch 2.54mm, 1 Row, 4P", Contact Resistance=20mOhm, Manufacturer="Wurth Elektronik", Operating Temperature Max=105°C, Operating Temperature Min=-40°C, Rated Current=3A, Withstanding Voltage=500V, Working Voltage=250V, Category="Board-to-Board Connectors", ComponentLink1Description="Website Link", ComponentLink1URL=https://www.we-online.com/redexpert/article/61300411121?ad, ComponentLink2Description="Datasheet Link", ComponentLink2URL=https://www.we-online.com/redexpert/spec/61300411121?ad, Gender="Pin Header", Manufacturer Part Number=61300411121, Match Code=WR-PHD, Mount="Through Hole", Number of Pins=4, Number of Rows=1, Orientation=Vertical, Packaging=Bag, Pitch=2.54mm, Purpose=WLAN-BOOT-Interfaxce
R1 R3: library part CMP-2003-01283-2, "1.8MΩ ±1% 0.25W Chip Resistor 1206 Thick Film AEC-Q200 Qualified", Case Code (Imperial)=1206, Case Code (Metric)=3216, Power Rating=250mW, Resistance=1.8MR, Resistance Tolerance=1%, Resistor Type="Thick Film", Temperature Coefficient=200ppm/°C, Voltage Rating=200V, Case/Package=1206, Lead Free="Lead Free", Number of Pins=2, RoHS Compliant=Yes, Series=RK73H, Tolerance=1%
R2: library part CMP-2001-04908-2, "RES Thick Film, 10kΩ, 1%, 0.125W, 100ppm/°C, 0805", Case Code (Imperial)=0805, Case Code (Metric)=2012, Max Operating Temperature=155°C, Min Operating Temperature=-55°C, Package Quantity=5000, Power Rating=125mW, Resistance=10kR, Temperature Coefficient=100ppm/°C, Tolerance=1%, Voltage Rating=150V, Case/Package=0805, Composition="Thick Film", Contact Plating=Tin, Depth=1.25mm, Height=0.45mm, Lead Free="Lead Free", Length=2mm, Military Standard=Not, Packaging="Tape and Reel", Radiation Hardening=No, Termination=SMD/SMT, Voltage Rating (DC)=150V, Weight=0.000194oz, Width=1.25mm
R4: library part CMP-2000-03379-3, "RES SMD 47K OHM 1% 1/10W 0603", Case Code (Imperial)=0603, Case Code (Metric)=1608, Max Operating Temperature=155°C, Max Power Dissipation=100mW, Min Operating Temperature=-55°C, Package Quantity=5000, Resistance=47kR, Resistance Tolerance=1%, Resistor Type="Thick Film", Temperature Coefficient=100ppm/°C, Voltage Rating=75V, Case/Package=0603, Construction=Rectangular, Contact Plating=Tin, Depth=0.85mm, Features="Automotive AEC-Q200", Height=0.45mm, Lead Free="Lead Free", Length=1.55mm, Military Standard=Not, Mount="Surface Mount", Number of Terminations=2, Packaging="Tape and Reel", Power Rating=100mW, Radiation Hardening=No, RoHS Compliant=Yes, Series=CRCW, Size Code=0603, Technology="THICK FILM", Termination=SMD/SMT, Tolerance=1%, Voltage Rating (DC)=75V, Weight=7.1E-05oz, Width=0.85mm
R5: library part CMP-03211-002463-1, "CRGCQ0805 1MΩ 0.125W ±100ppm/°C 1% 150V", Ambient Temperature Range High=+70°C, Manufacturer="TE Connectivity", Package=CRGCQ0805, Power Rating=0.125W, Resistance=1MΩ, Temperature="-55°C to +155°C", Temperature Coefficient=±100ppm/°C, Temperature Range High=+155°C, Temperature Range Low=-55°C, Tolerance=0.01, Voltage Rating=150V, Automotive=Yes, Automotive Grade="Grade 1369", Category=Res, ComponentLink2Description=Datasheet, ComponentLink2URL=https://www.te.com/commerce/DocumentDelivery/DDEController?Action=showdoc&DocId=Data+Sheet%7F1773204-3%7F1%7Fpdf%7FEnglish%7FENG_DS_1773204-3_1.pdf%7F4-2176341-1378, Composition="Thick Film", Device Class L1="Passive Components", Device Class L2=Resistors, Device Class L3="Chip SMD Resistors", Height=0.65mm, Ipc Land Pattern Name=RESC200125X55, Lead Free=Yes, Manufacturer Part Number=CRGCQ0805F1M0, Octopart=https://octopart.com/crgcq0805f1m0-te+connectivity-91018158, RoHS=TRUE, Series=CRGCQ
R9 R10 R11: library part CMP-2000-03370-2, "RES Thick Film, 470kΩ, 1%, 0.1W, 100ppm/°C, 0603", Case Code (Imperial)=0603, Case Code (Metric)=1608, Max Operating Temperature=155°C, Max Power Dissipation=100mW, Min Operating Temperature=-55°C, Package Quantity=10, Resistance=470kR, Temperature Coefficient=100ppm/°C, Tolerance=1%, Voltage Rating=75V, Case/Package=0603, Composition="Thick Film", Contact Plating=Tin, Depth=0.85mm, Features="Automotive AEC-Q200", Height=0.45mm, Lead Free="Lead Free", Length=1.55mm, Military Standard=Not, Mount="Surface Mount", Number of Pins=2, Number of Terminations=2, Packaging="Tape and Reel", Power Rating=100mW, Radiation Hardening=No, Termination=SMD/SMT, Voltage Rating (DC)=75V, Weight=7.1E-05oz, Width=0.033inch
R12: library part CMP-08839-030818-1, "Res Thick Film 0603 47kΩ 1% 0.1W ±100ppm/°C Automotive Paper T/R", Case Code (Imperial)=0603, Case Code (Metric)=1608, Max Operating Temperature=155°C, Max Power Dissipation=100mW, Min Operating Temperature=-55°C, Package Quantity=1, Resistance=47kR, Resistor Type="Thick Film", Temperature Coefficient=100ppm/°C, Tolerance=1%, Case/Package=0603, Features="Automotive AEC-Q200", Height=0.022inch, Length=0.063inch, Number of Terminations=2, Packaging="Tape and Reel", Series=KTR, Width=0.031inch
R13: library part CMP-03211-006634-1, "RES SMD 20KΩ 0.1% 1/16W 0603", Manufacturer="TE Connectivity", Package=CPF0603, Power Rating=0.063W, Resistance=20KΩ, Temperature="-55°C to +155°C", Temperature Coefficient=25ppm/°C, Temperature Range High=+155°C, Temperature Range Low=-55°C, Tolerance=0.1%, Voltage Rating=50V, Automotive=No, Category=Res, ComponentLink2Description=Datasheet, ComponentLink2URL=https://www.te.com/commerce/DocumentDelivery/DDEController?Action=showdoc&DocId=Data+Sheet%7F1773200%7FM%7Fpdf%7FEnglish%7FENG_DS_1773200_M.pdf%7F3-1676481-2, Composition="Thin Film", Device Class L1="Passive Components", Device Class L2=Resistors, Device Class L3="Chip SMD Resistors", Height=0.55mm, Ipc Land Pattern Name=RESC15580X45, Lead Free=Yes, Manufacturer Part Number=CPF0603B20KE1, Octopart=https://octopart.com/cpf0603b20ke1-te+connectivity-22738773, octopart_url=https://octopart.com/cpf0603b20ke1-te+connectivity-22738773, Packaging="1k Reel", RoHS=TRUE, Series=CPF
R14: library part CMP-2000-04828-3, "RES 1kΩ 1.00% 0.1W 0603", Case Code (Imperial)=0603, Case Code (Metric)=1608, Max Operating Temperature=155°C, Max Power Dissipation=100mW, Min Operating Temperature=-55°C, Package Quantity=1, Ratings=AEC-Q200, Resistance=1kR, Resistor Type="Thick Film", Temperature Coefficient=100ppm/°C, Tolerance=1%, Voltage Rating=50V, Case/Package=0603, Construction=Rectangular, Depth=0.8mm, Features="Moisture Resistant", Height=0.022inch, Lead Free="Lead Free", Length=0.063inch, Military Standard=Not, Number of Terminations=2, Packaging="Tape and Reel", Power Rating=100mW, RoHS Compliant=Yes, Series=AC, Size Code=0603, Termination=SMD/SMT, Width=0.031inch
R15 R16: library part CMP-2000-02995-2, "RES Thick Film, 1.5kΩ, 1%, 0.1W, 100ppm/°C, 0603", Case Code (Imperial)=0603, Case Code (Metric)=1608, Max Operating Temperature=155°C, Max Power Dissipation=100mW, Min Operating Temperature=-55°C, Package Quantity=10, Resistance=1.5kR, Temperature Coefficient=100ppm/°C, Tolerance=1%, Voltage Rating=75V, Case/Package=0603, Composition="Thick Film", Contact Plating=Tin, Depth=0.85mm, Features="Automotive AEC-Q200", Height=0.45mm, Lead Free="Lead Free", Length=1.55mm, Military Standard=Not, Mount="Surface Mount", Number of Terminations=2, Packaging="Tape and Reel", Power Rating=100mW, Termination=SMD/SMT, Voltage Rating (DC)=75V, Weight=7.1E-05oz, Width=0.033inch, Working Voltage=75V
RV1: library part 820412711, "WE-VD Disk Varistor, THT, 275VAC, 350VDC, 190pF", (Reverse) Breakdown Voltage=430V, (Reverse) Peak Pulse Current=3500A, Channel Input Capacitance=190pF, Clamping Voltage=710V, Manufacturer="Wurth Elektronik", Operating Temperature Max=85°C, Operating Temperature Min=-40°C, Operating Voltage (AC)=275V, Operating Voltage (DC)=350V, Power Dissipation=0.4W, Category="Surge Protection", ComponentLink1Description="Website Link", ComponentLink1URL=https://www.we-online.com/redexpert/article/820412711?ad, ComponentLink2Description="Datasheet Link", ComponentLink2URL=https://www.we-online.com/redexpert/spec/820412711?ad, Diameter=12.5mm, Energy Absorption=80J, Height=16mm, Manufacturer Part Number=820412711, Match Code=WE-VD, Mount="Through Hole", Packaging="Tape and Reel", Pitch=1.3mm, Width=6.5mm
U1: library part CMP-0136-00788-1, "Low Quiescent Current LDO, 3-Pin SOT-23, Extended Temperature, Tape and Reel", Output Voltage=3.3V, Code_IPC=SOT23-3, DatasheetVersion="revB, Feb-2007", PackageDescription="3-Lead Plastic Small Outline Transistor (TT) [SOT-23]", PackageReference=SOT-23-TT3, PackageVersion="revBB, Aug-2009"
U2: library part CMP-04869-000074-1, "IC MCU 16BIT 32KB FLASH 32VQFN", Case/Package=VQFN, Frequency=16.384MHz, Max Operating Temperature=105°C, Max Supply Voltage=3.6V, Min Operating Temperature=-40°C, Min Supply Voltage=2.2V, Package Quantity=3000, Contact Plating=Gold, Core Architecture=MSP430, Data Bus Width=16b, Interface=I2C, Lead Free="Lead Free", Max Frequency=16.384MHz, Memory Size=32KB, Memory Type=FLASH, Mount="Surface Mount", Number of ADC Channels=4, Number of I/Os=16, Number of Pins=32, Number of Programmable I/O=16, Number of Timers/Counters=2, Number of UART Channels=1, Oscillator Type=External, Packaging="Tape and Reel", Peripherals="Brown-out Detect/Reset", Radiation Hardening=No, RAM Size=2KB, RoHS Compliant=Yes, Watchdog Timer=Yes, Weight=0.002547oz
XF1: "WR-FSH Fuseholder THT Blocks PCB Clip Cover", Manufacturer="Wurth Elektronik", Operating Temperature Max=120°C, Operating Temperature Min=-30°C, Category="Fuse Holder", ComponentLink1Description="Website Link", ComponentLink1URL=https://www.we-online.com/redexpert/article/696106003002?ad, ComponentLink2Description="Datasheet Link", ComponentLink2URL=https://www.we-online.com/redexpert/spec/696106003002?ad, Fuse="1.5A (T)", Fuse Size=5x20mm, Manufacturer Part Number=696106003002, Match Code=WR-FSH, Mount=THT, Packaging=Box

## Via types
v1: diameter 0.55, hole 0.2, Top Layer to Bottom Layer, 445 vias
v2: diameter 0.55, hole 0.2, Top Layer to Bottom Layer, tented both sides, 145 vias
v3: diameter 7, hole 4, Top Layer to Bottom Layer, 6 vias

## Nets (pads, with @x,y where several pads share a name; then routed paths per layer and width w, separated by ;. In a path a pad name is that pad's centre, name@x,y a point inside that pad or via, vN(x,y) a via of type N, cw(c..) or ccw(c..) an arc to the next point about the centre after c; other vN are vias at no path point)
+3.3V: C8.1 C9.2 C15.1 C20.2 C22.2 FB3.2 IC2.12 MOD1.5 P1.2 P2.2 P3.1 P7.2 R4.2 R12.2 R15.2 R16.2 U1.2 U2.13 U2.28 | length 46.9
  Top Layer w0.2: U2.28@104.215,50.152 104.24,50.177 104.24,50.749 v1(104.267,50.776)
  Top Layer w0.25: U2.13@104.215,45.352 104.215,44.921 105.001,44.135 105.001,43.96 105.254,43.707 105.266,43.707 C22.2@105.429,43.707
  Top Layer w0.5: v1(46.709,61.046) 46.709,61.06 46.696,61.073 46.696,61.73 FB3.2@46.72,61.73 ; R16.2@57.369,32.781 57.405,32.818 58.297,32.818 v1(58.306,32.827) ; v1(58.245,52.719) 58.258,52.719 58.283,52.694 58.304,52.694 v1(58.674,52.324) ; MOD1.5@62.09,30.27 62.34,30.52 62.638,30.52 62.879,30.761 63.012,30.761 v1(63.022,30.771) ; R15.2@64.819,19.237 64.819,19.274 65.1,19.555 65.536,19.555 65.653,19.672 v1(65.666,19.672) ; U1.2@102.398,67.755 102.398,67.578 102.448,67.528 C20.2@104.48,67.528 ; R4.2@104.442,58.873 104.451,58.883 104.451,59.766 v1(104.46,59.775) ; v1(105.156,42.937) 105.166,42.947 105.166,43.607 C22.2@105.266,43.707 ; v1@105.268,42.941 v1(105.671,42.941) 105.661,42.951 105.661,43.579 105.533,43.707 C22.2@105.429,43.707 ; C20.2@104.48,67.528 104.688,67.32 105.449,67.32 105.49,67.279 v1(105.503,67.279) v1(105.503,67.787) 105.494,67.777 105.229,67.777 105.208,67.756 104.708,67.756 C20.2@104.48,67.528
  Top Layer w0.65: C9.2@57.953,37.671 57.81,37.814 57.81,42.912 58.118,43.219 58.28,43.219 58.66,43.6 58.66,43.639 60.68,43.639 60.755,43.714 60.755,44.252 v1(60.7,44.307) ; v1@60.731,43.69 61.429,43.69 61.638,43.899 61.638,44.037 61.429,44.246 60.867,44.246 v1@60.808,44.305 ; R12.2@109.418,46.99 109.44,46.968 v1(110.161,46.968)
  N / GND w0.5: v1(58.245,52.719) 58.258,52.719 58.283,52.694 58.304,52.694 v1(58.674,52.324) ; v1(105.156,42.937) 105.159,42.94 v1@105.67,42.94 ; v1(105.503,67.279) v1(105.503,67.787)
  Bottom Layer w0.5: v1@46.719,61.056 51.939,61.056 57.95,55.045 57.95,53.145 58.235,52.86 58.235,52.729 v1(58.245,52.719) 58.258,52.719 58.283,52.694 58.304,52.694 v1(58.674,52.324) ; v1(105.156,42.937) 105.159,42.94 v1@105.67,42.94 ; v1(105.503,67.279) v1(105.503,67.787)
  other v1: 106.686,38.019 107.194,38.019 107.702,38.019 106.686,38.527 107.194,38.527 107.702,38.527 106.686,39.035 107.194,39.035 107.702,39.035 106.686,39.543 107.194,39.543 107.702,39.543 60.715,43.674
+3.3VTMCS: C4.2 FB3.1 IC1.4 | length 6.8
  Top Layer w0.5: IC1.4@41.773,62.838 41.823,62.888 41.823,63.842 42.243,64.262 43.878,64.262 44.498,63.642 44.498,63.517 44.726,63.288 46.162,63.288 46.67,62.78 46.67,62.73 FB3.1@46.72,62.73
+5.0V: C18.1 C19.2 M1.3 P2.1 P3.2 P9.2 U1.3 | length 83
  Top Layer w1: M1.3@72.227,29.647 72.418,29.456 73.16,29.456 78.232,24.384 P2.1@78.232,21.844 ; M1.3@87.944,35.814 88.215,35.814 89.555,37.154 95.066,37.154 95.668,37.756 v1(95.668,38.009) ; P3.2@90.805,68.58 P9.2@93.98,68.58 95.22,69.82 v1(97.034,69.82) 97.284,69.57 97.293,69.57 ; v1(97.034,69.312) 97.293,69.57 ; U1.3@101.448,69.555 101.432,69.57 C19.2@98.041,69.57 97.293,69.57
  N / GND w0.5: v1(97.034,69.312) v1(97.034,69.82)
  L / VCC w0.5: v1(97.034,69.312) v1(97.034,69.82)
  Bottom Layer w1: M1.3@72.227,29.647 75.981,33.401 79.121,33.401 81.534,35.814 M1.3@87.944,35.814 ; v1(95.16,39.025) v1(95.668,39.533) 98.295,42.16 98.295,61.095 98.295,62.684 97.709,63.269 97.034,63.944 v1(97.034,69.312) v1(97.034,69.82)
  other v1: 94.652,38.009 95.16,38.009 94.652,38.517 95.16,38.517 95.668,38.517 94.652,39.025 95.668,39.025 94.652,39.533 95.16,39.533
\MOD1_U1CTS: MOD1.7 U2.26 | length 61.5
  Top Layer w0.2: MOD1.7@58.84,30.27 59.618,31.049 60.424,31.049 60.875,31.5 60.892,31.5 61.203,31.811 64.071,31.811 64.833,32.573 93.031,32.573 95.229,34.772 98.851,34.772 99.596,35.517 101.46,35.517 101.891,35.948 101.924,35.948 102.067,36.091 v1(102.161,36.091) ; v1(105.079,49.478) 105.079,49.573 105.19,49.683 105.19,50.127 U2.26@105.215,50.152
  Bottom Layer w0.2: v1(102.161,36.091) 102.161,36.125 102.428,36.391 102.428,42.158 102.457,42.187 102.457,42.473 104.709,44.726 104.709,46.217 105.254,46.763 105.6,47.109 105.6,48.591 105.176,49.016 105.176,49.183 105.146,49.212 105.146,49.411 v1(105.079,49.478)
\MOD1_U1RTS: MOD1.6 U2.27 | length 62.3
  Top Layer w0.2: MOD1.6@60.34,30.27 60.74,30.67 60.74,30.895 61.336,31.491 64.203,31.491 64.965,32.253 93.163,32.253 95.362,34.452 98.984,34.452 99.729,35.197 101.592,35.197 101.782,35.387 102.127,35.387 v1(102.161,35.421) ; U2.27@104.715,50.152 104.74,50.177 104.74,50.506 104.937,50.703 v1(104.937,50.798)
  Bottom Layer w0.2: v1(102.161,35.421) 102.131,35.421 101.666,35.886 101.666,36.32 102.108,36.762 102.108,42.291 102.137,42.32 102.137,42.606 104.389,44.858 104.389,46.35 105.26,47.221 105.26,48.478 104.584,49.154 104.584,50.37 104.937,50.723 v1(104.937,50.798)
\RST: C23.2 P8.11 R12.1 U2.15 | length 38.5